# Altium PCB Mad17(grr).PcbDoc (part 3 of 3)
Units mil, origin at the board's own origin, x right, y up, seen from the top; angles counter-clockwise.
Board outline 5600 x 3900 mil, 2 copper layers (Top Layer, Bottom Layer); 72 components, 51 nets, 251 pads, 49 vias.
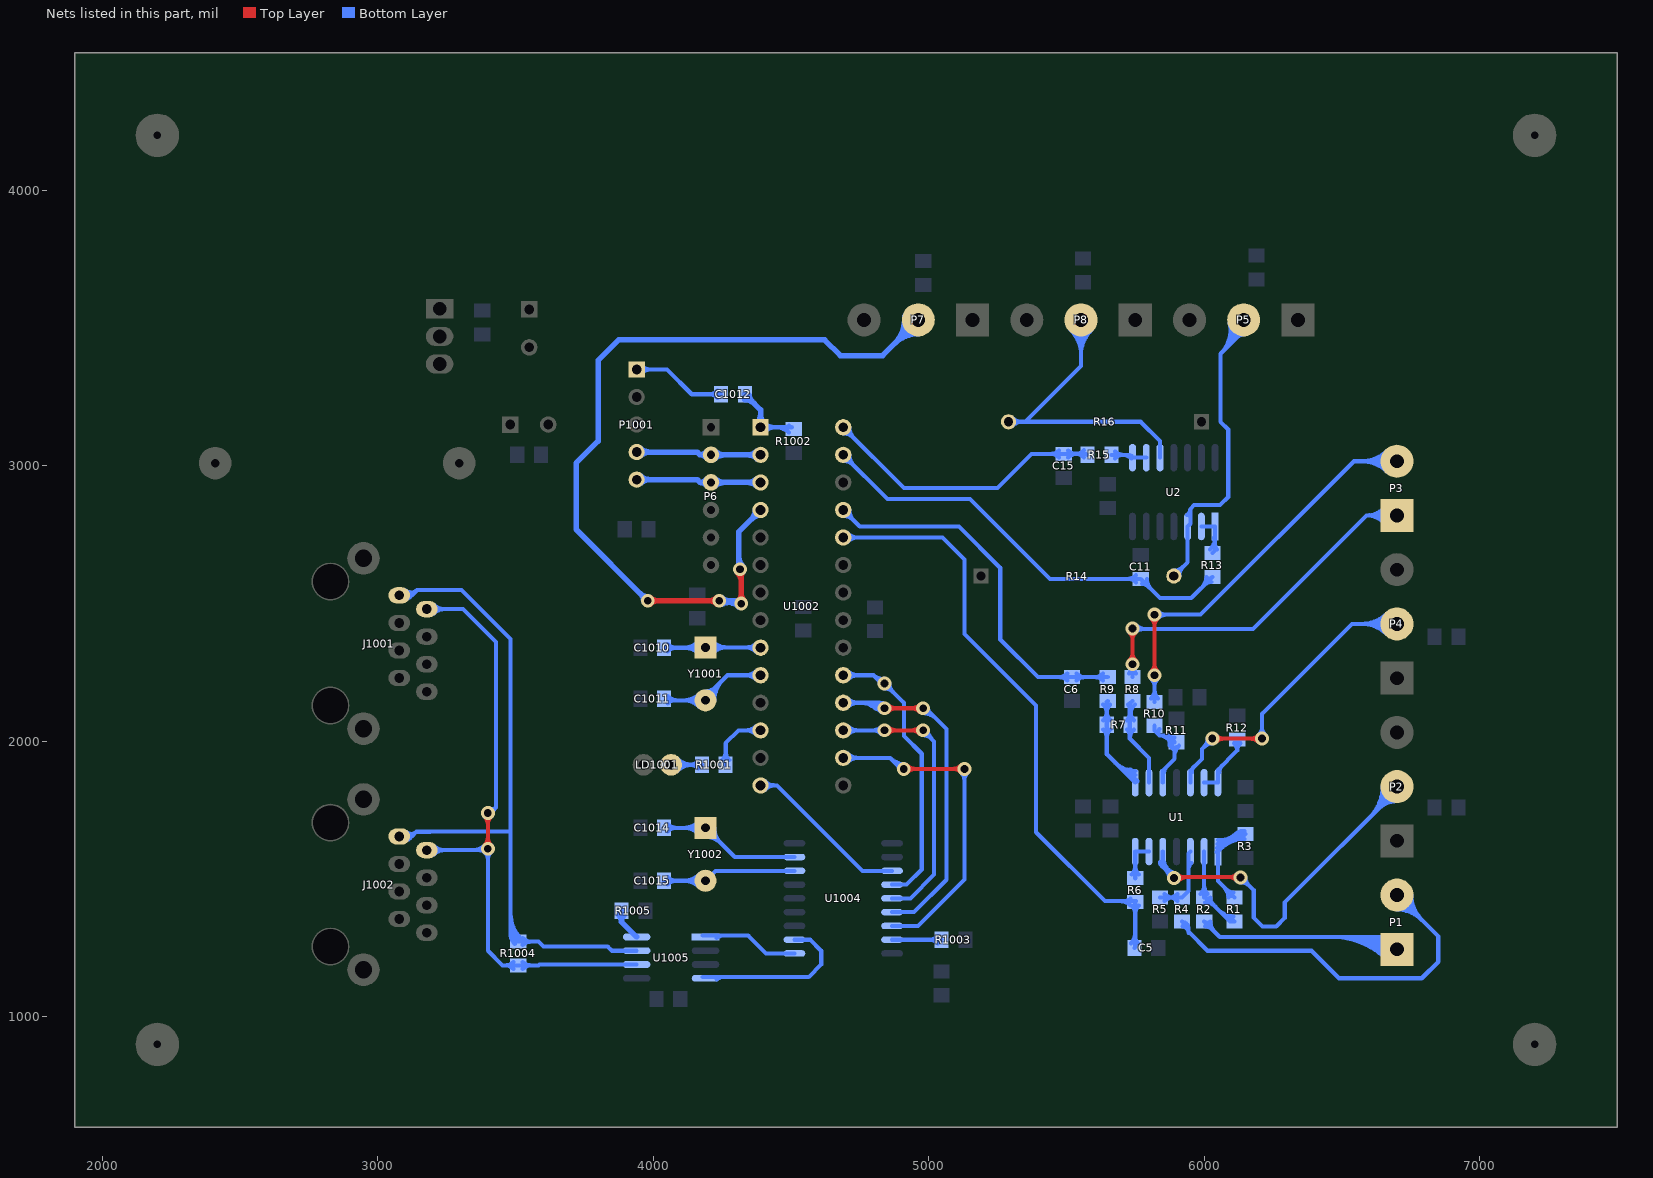
[diagram p3: the nets of this part, all layers, seen from the top]

## Via types
v1: diameter 50, hole 28, Top Layer to Bottom Layer, 49 vias

## Nets (pads, with @x,y where several pads share a name; then routed paths per layer and width w, separated by ;. In a path a pad name is that pad's centre, name@x,y a point inside that pad or via, vN(x,y) a via of type N, cw(c..) or ccw(c..) an arc to the next point about the centre after c; other vN are vias at no path point) (continued)
CAN_H: J1001.1 J1002.1 R1004.2 U1005.7 | length 3450.4
  Bottom Layer w15: J1002.1@3078.43,1655 3123.79,1655 ; J1001.1@3083.37,2523.71 ccw(c3100.29,2545.45) 3119.76,2525.97 ; J1001.1@3092.58,2535.55 ccw(c3110.8,2558.96) 3131.78,2537.99 ; J1001.1@3098.43,2550 J1001.1@3078.43,2530 3123.79,2530 ; J1001.1@3101.79,2547.39 ccw(c3121.31,2572.48) 3143.79,2550 ; 3189.53,1672.03 3140.82,1672.03 ; 3189.53,1672.5 3480,1672.5 ; 3482.5,1301.44 ccw(c3534.2,1301.44) R1004.2@3497.64,1264.89 ; 3482.5,1337.65 ccw(c3570.41,1337.65) R1004.2@3508.25,1275.49 ; 3482.5,1373.87 ccw(c3606.62,1373.87) R1004.2@3518.85,1286.1 ; U1005.7@3940,1240 3850,1240 3835,1255 3601.79,1255 3583.48,1273.31 R1004.2@3510,1273.31 3482.5,1300.81 ; 3123.79,1655 cw(c3123.79,1672.63) 3108,1664.79 ccw(c3123.79,1672.63) 3123.79,1655 ; 3123.79,1655 ccw(c3123.79,1637.37) 3108,1645.21 cw(c3123.79,1637.37) 3123.79,1655 ; 3123.79,1655 3140.82,1672.03 ; 3123.79,2530 cw(c3123.79,2547.63) 3108,2539.79 ccw(c3123.79,2547.63) 3123.79,2530 ; 3123.79,2530 ccw(c3123.79,2512.37) 3108,2520.21 cw(c3123.79,2512.37) 3123.79,2530 ; 3123.79,2530 3143.79,2550 ; 3140.82,1672.03 cw(c3121.57,1691.27) 3103.17,1671.22 ccw(c3121.57,1691.27) 3140.82,1672.03 ; 3143.79,2550 3303.64,2550 3482.5,2371.14 3482.5,1300.81 ; 3482.5,1300.81 cw(c3465.83,1284.14) 3488.59,1278.01 ccw(c3465.83,1284.14) 3482.5,1300.81 ; 3482.5,1300.81 ccw(c3505.23,1323.54) 3505.76,1291.4 cw(c3505.23,1323.54) 3482.5,1300.81 ; 3557.61,1273.31 cw(c3557.61,1316.98) 3526.73,1286.1 ccw(c3557.61,1316.98) 3557.61,1273.31 ; 3557.61,1273.31 ccw(c3557.61,1229.63) 3526.73,1260.52 cw(c3557.61,1229.63) 3557.61,1273.31 ; J1002.1@3082.88,1649.13 ccw(c3100.38,1668.19) 3118.68,1649.89 cw(c3100.38,1668.19) J1002.1@3082.88,1649.13 ; J1002.1@3093.02,1660.18 ccw(c3110.98,1679.73) 3129.75,1660.96 cw(c3110.98,1679.73) J1002.1@3093.02,1660.18
CAN_L: J1001.2 J1002.2 R1004.1 U1005.6 | length 3188.9
  Top Layer w15: v1(3400,1610) v1(3400,1740) ; 3400,1652.25 cw(c3357.75,1652.25) 3387.63,1622.37 ccw(c3357.75,1652.25) 3400,1652.25 ; 3400,1652.25 ccw(c3442.25,1652.25) 3412.37,1622.37 cw(c3442.25,1652.25) 3400,1652.25 ; 3400,1697.75 cw(c3442.25,1697.75) 3412.37,1727.63 ccw(c3442.25,1697.75) 3400,1697.75 ; 3400,1697.75 ccw(c3357.75,1697.75) 3387.63,1727.63 cw(c3357.75,1697.75) 3400,1697.75
  Bottom Layer w15: J1002.2@3178.43,1605 v1@3395,1605 ; J1001.2@3178.43,2480 3310,2480 3430,2360 3430,1760 ; J1002.2@3203.84,1589.42 cw(c3241.45,1551.82) 3241.45,1605 cw(c3241.45,1658.18) J1002.2@3203.84,1620.58 ; J1001.2@3203.84,2464.42 cw(c3241.45,2426.82) 3241.45,2480 cw(c3241.45,2533.18) J1001.2@3203.84,2495.58 ; v1@3389.08,1596.32 cw(c3370.98,1573.64) 3400,1573.64 ; v1(3400,1610) 3400,1573.64 ; v1(3400,1740) 3410,1740 3430,1760 ; v1@3410.92,1596.32 ccw(c3429.02,1573.64) 3400,1573.64 ; U1005.6@3940,1190 3586.79,1190 3583.48,1186.69 R1004.1@3510,1186.69 3453.31,1186.69 3400,1240 3400,1573.64 ; 3430,1760 cw(c3415.7,1774.3) 3407.28,1755.91 ccw(c3415.7,1774.3) 3430,1760 ; 3462.39,1186.69 cw(c3462.39,1143.02) 3493.27,1173.9 ccw(c3462.39,1143.02) 3462.39,1186.69 ; 3462.39,1186.69 ccw(c3462.39,1230.37) 3493.27,1199.48 cw(c3462.39,1230.37) 3462.39,1186.69 ; 3557.61,1186.69 cw(c3557.61,1230.37) 3526.73,1199.48 ccw(c3557.61,1230.37) 3557.61,1186.69 ; 3557.61,1186.69 ccw(c3557.61,1143.02) 3526.73,1173.9 cw(c3557.61,1143.02) 3557.61,1186.69 ; 3345.68,1605 ccw(c3345.68,1664.32) 3387.63,1622.37 cw(c3345.68,1664.32) 3345.68,1605 ; 3369.82,1605 cw(c3369.82,1579.82) 3387.63,1597.63 ccw(c3369.82,1579.82) 3369.82,1605 ; v1@3417.5,1740 cw(c3435.61,1740) 3422.8,1752.8 ccw(c3435.61,1740) v1@3417.5,1740
INCURRENT: C11.2 R13.2 U1002.27 | length 2137.5
  Bottom Layer w15: U1002.27@4690,3040 4850,2880 5150,2880 5440,2590 C11.2@5770,2590 5840,2520 5953.31,2520 R13.2@6030,2596.69 ; C11.2@5773.94,2571.91 cw(c5773.94,2537.74) 5798.1,2561.9 ; C11.2@5792.03,2590 ccw(c5845.21,2590) 5807.6,2552.4 ; 5999.83,2566.32 cw(c6037.43,2556.25) R13.2@6026.9,2593.72 ; 4727.6,3002.4 cw(c4765.21,3040) 4712.03,3040 ccw(c4765.21,3040) 4727.6,3002.4 ; 4727.6,3002.4 ccw(c4690,2964.79) 4690,3017.97 cw(c4690,2964.79) 4727.6,3002.4 ; 5722.39,2590 cw(c5722.39,2546.33) 5753.27,2577.21 ccw(c5722.39,2546.33) 5722.39,2590 ; 5722.39,2590 ccw(c5722.39,2633.67) 5753.27,2602.79 cw(c5722.39,2633.67) 5722.39,2590 ; 5992.4,2559.09 ccw(c5954.79,2596.69) 6007.97,2596.69 cw(c5954.79,2596.69) 5992.4,2559.09 ; 6001.9,2568.59 cw(c6026.06,2544.43) 6026.06,2578.6 ccw(c6026.06,2544.43) 6001.9,2568.59
LED: R1001.2 U1002.12 | length 445.1
  Bottom Layer w15: R1001.2@4263.31,1915 4263.31,1993.31 4310,2040 U1002.12@4390,2040 ; U1002.12@4374.42,2024.42 ccw(c4336.82,1986.82) 4336.82,2040 ccw(c4336.82,2093.18) U1002.12@4374.42,2055.58 ; 4263.31,1962.61 cw(c4219.63,1962.61) 4250.52,1931.73 ccw(c4219.63,1962.61) 4263.31,1962.61 ; 4263.31,1962.61 ccw(c4306.98,1962.61) 4276.1,1931.73 cw(c4306.98,1962.61) 4263.31,1962.61
MCP2515_INT: U1002.14 U1004.12 | length 689.1
  Bottom Layer w15: U1002.14@4390,1840 4450,1840 4760,1530 U1004.12@4867.17,1530 ; U1002.14@4405.58,1824.42 cw(c4443.18,1786.82) 4443.18,1840 cw(c4443.18,1893.18) U1002.14@4405.58,1855.58
MCP2515_MISO: U1002.18 U1004.15 | length 2300
  Top Layer w15: v1(4840,2120) v1(4980,2120) ; 4882.25,2120 cw(c4882.25,2162.25) 4852.37,2132.37 ccw(c4882.25,2162.25) 4882.25,2120 ; 4882.25,2120 ccw(c4882.25,2077.75) 4852.37,2107.63 cw(c4882.25,2077.75) 4882.25,2120 ; 4937.75,2120 cw(c4937.75,2077.75) 4967.63,2107.63 ccw(c4937.75,2077.75) 4937.75,2120 ; 4937.75,2120 ccw(c4937.75,2162.25) 4967.63,2132.37 cw(c4937.75,2162.25) 4937.75,2120
  Bottom Layer w15: U1002.18@4690,2140 4820,2140 v1(4840,2120) ; 4786.53,2131.35 ccw(c4806.02,2165.11) v1@4829.47,2133.98 ; 4806.12,2136.77 ccw(c4820.22,2161.18) v1@4832.42,2135.77 ; 4806.16,2120.02 ccw(c4820.83,2145.44) v1@4838.5,2122 ; 4807.25,2136.12 cw(c4790.25,2106.67) v1@4823.1,2115.47 ; U1004.15@4867.17,1380 4947.28,1380 5065,1497.72 5065,2045 4990,2120 v1(4980,2120) ; v1@4982.33,2120.91 ccw(c5024.49,2137.47) 5012.76,2093.72 ; 4743.18,2140 cw(c4743.18,2193.18) 4705.58,2155.58 ccw(c4743.18,2193.18) 4743.18,2140 ; 4743.18,2140 ccw(c4743.18,2086.82) 4705.58,2124.42 cw(c4743.18,2086.82) 4743.18,2140 ; 4749.47,2140 cw(c4749.47,2029.47) 4827.63,2107.63 ccw(c4749.47,2029.47) 4749.47,2140 ; 4785.68,2140 cw(c4785.68,2065.68) 4838.23,2118.23 ccw(c4785.68,2065.68) 4785.68,2140 ; 4821.89,2140 cw(c4821.89,2101.89) 4848.84,2128.84 ccw(c4821.89,2101.89) 4821.89,2140 ; v1@4980,2102.5 cw(c4980,2036.11) 5026.95,2083.05 ccw(c4980,2036.11) v1@4980,2102.5 ; v1@4997.5,2120 ccw(c5015.61,2120) 5002.8,2107.2 cw(c5015.61,2120) v1@4997.5,2120
MCP2515_MOSI: U1002.17 U1004.14 | length 1726.8
  Top Layer w15: v1(4840,2040) v1@4990,2040 ; 4882.25,2040 cw(c4882.25,2082.25) 4852.37,2052.37 ccw(c4882.25,2082.25) 4882.25,2040 ; 4882.25,2040 ccw(c4882.25,1997.75) 4852.37,2027.63 cw(c4882.25,1997.75) 4882.25,2040 ; 4937.75,2040 cw(c4937.75,1997.75) 4967.63,2027.63 ccw(c4937.75,1997.75) 4937.75,2040 ; 4937.75,2040 ccw(c4937.75,2082.25) 4967.63,2052.37 cw(c4937.75,2082.25) 4937.75,2040
  Bottom Layer w15: U1002.17@4690,2040 v1(4840,2040) ; U1004.14@4867.17,1430 4933.64,1430 5020,1516.36 5020,2000 v1(4980,2040) ; 4743.18,2040 cw(c4743.18,2093.18) 4705.58,2055.58 ccw(c4743.18,2093.18) 4743.18,2040 ; 4743.18,2040 ccw(c4743.18,1986.82) 4705.58,2024.42 cw(c4743.18,1986.82) 4743.18,2040 ; 4797.75,2040 cw(c4797.75,1997.75) 4827.63,2027.63 ccw(c4797.75,1997.75) 4797.75,2040 ; 4797.75,2040 ccw(c4797.75,2082.25) 4827.63,2052.37 cw(c4797.75,2082.25) 4797.75,2040 ; 5009.87,2010.13 cw(c5039.75,2040) 4997.5,2040 ccw(c5039.75,2040) 5009.87,2010.13 ; 5009.87,2010.13 ccw(c4980,1980.25) 4980,2022.5 cw(c4980,1980.25) 5009.87,2010.13
MCP2515_SCK: U1002.19 U1004.13 | length 1434.5
  Bottom Layer w15: U1002.19@4690,2240 4800,2240 ; U1004.13@4867.17,1480 4920,1480 4975,1535 4975,1955 4910,2020 4910,2140 v1(4840,2210) 4830,2220 4820,2220 4800,2240 ; 4743.18,2240 cw(c4743.18,2293.18) 4705.58,2255.58 ccw(c4743.18,2293.18) 4743.18,2240 ; 4743.18,2240 ccw(c4743.18,2186.82) 4705.58,2224.42 cw(c4743.18,2186.82) 4743.18,2240 ; 4800,2240 ccw(c4831.56,2271.56) 4837.62,2227.34 cw(c4831.56,2271.56) 4800,2240 ; 4869.87,2180.13 cw(c4899.75,2210) 4857.5,2210 ccw(c4899.75,2210) 4869.87,2180.13 ; 4869.87,2180.13 ccw(c4840,2150.25) 4840,2192.5 cw(c4840,2150.25) 4869.87,2180.13 ; 4817.2,2222.8 cw(c4804.39,2210) 4822.5,2210 ccw(c4804.39,2210) 4817.2,2222.8
MCP2515_SS: U1002.16 U1004.16 | length 1847.1
  Top Layer w15: v1(4910,1900) v1(5130,1900) ; 4952.25,1900 cw(c4952.25,1942.25) 4922.37,1912.37 ccw(c4952.25,1942.25) 4952.25,1900 ; 4952.25,1900 ccw(c4952.25,1857.75) 4922.37,1887.63 cw(c4952.25,1857.75) 4952.25,1900 ; 5087.75,1900 cw(c5087.75,1857.75) 5117.63,1887.63 ccw(c5087.75,1857.75) 5087.75,1900 ; 5087.75,1900 ccw(c5087.75,1942.25) 5117.63,1912.37 cw(c5087.75,1942.25) 5087.75,1900
  Bottom Layer w15: U1002.16@4690,1940 4860,1940 4900,1900 v1(4910,1900) ; U1002.16@4705.58,1924.42 cw(c4743.18,1886.82) 4743.18,1940 cw(c4743.18,1993.18) U1002.16@4705.58,1955.58 ; U1004.16@4867.17,1330 4960.92,1330 5130,1499.08 v1(5130,1900) ; 4877.24,1926.28 cw(c4865.51,1882.53) v1@4907.67,1899.09 ; 5130,1857.75 cw(c5172.25,1857.75) 5142.37,1887.63 ccw(c5172.25,1857.75) 5130,1857.75 ; 5130,1857.75 ccw(c5087.75,1857.75) 5117.63,1887.63 cw(c5087.75,1857.75) 5130,1857.75 ; 4863.05,1936.95 ccw(c4910,1983.89) 4910,1917.5 cw(c4910,1983.89) 4863.05,1936.95 ; 4887.2,1912.8 cw(c4874.39,1900) 4892.5,1900 ccw(c4874.39,1900) 4887.2,1912.8
MOTORRPM: P7.2 U1002.4 | length 4333.7
  Top Layer w20: v1(3980,2510) v1(4240,2510) ; v1(4315.47,2625) 4320,2620.47 v1(4320,2500) ; 4016.21,2510 cw(c4016.21,2546.21) 3990.61,2520.61 ccw(c4016.21,2546.21) 4016.21,2510 ; 4016.21,2510 ccw(c4016.21,2473.79) 3990.61,2499.39 cw(c4016.21,2473.79) 4016.21,2510 ; 4203.79,2510 cw(c4203.79,2473.79) 4229.39,2499.39 ccw(c4203.79,2473.79) 4203.79,2510 ; 4203.79,2510 ccw(c4203.79,2546.21) 4229.39,2520.61 cw(c4203.79,2546.21) 4203.79,2510 ; 4320,2536.21 cw(c4283.79,2536.21) 4309.39,2510.61 ccw(c4283.79,2536.21) 4320,2536.21 ; 4320,2536.21 ccw(c4356.21,2536.21) 4330.61,2510.61 cw(c4356.21,2536.21) 4320,2536.21 ; v1@4304.87,2614.39 cw(c4268.33,2577.86) 4320,2577.86 ccw(c4268.33,2577.86) v1@4304.87,2614.39 ; 4320,2599.72 cw(c4340.76,2599.72) 4326.08,2614.39 ccw(c4340.76,2599.72) 4320,2599.72
  Bottom Layer w20: v1@3965,2510 ccw(c3928.79,2510) 3954.39,2535.61 ccw(c3980,2561.21) v1@3980,2525 ; v1(3980,2510) 3720,2770 3720,3010 3800,3090 3800,3383.03 3874.47,3457.5 4622.5,3457.5 4680,3400 4832.6,3400 P7.2@4962.6,3530 ; v1(4240,2510) v1@4310,2510 ; 4285.1,2503.42 ccw(c4293.62,2518.17) v1@4307.65,2508.51 ; v1@4310,2640 4310,2760 U1002.4@4390,2840 ; U1002.4@4370.47,2840 cw(c4323.33,2840) 4356.66,2806.66 cw(c4390,2773.33) U1002.4@4390,2820.47 ; P7.2@4912.6,3530 cw(c4791.89,3530) 4877.24,3444.64 cw(c4962.6,3359.29) P7.2@4962.6,3480 ; P7.2@4913.15,3530 P7.2@4913.15,3543.54 ; P7.2@4932.6,3530 cw(c4860.17,3530) 4911.39,3478.79 cw(c4962.6,3427.57) P7.2@4962.6,3500 ; v1@4247.87,2497.23 cw(c4273.61,2455.46) 4286.31,2502.85 ; v1@4247.87,2497.23 cw(c4273.61,2455.46) 4286.31,2502.85 ; v1@4247.87,2497.23 cw(c4273.61,2455.46) 4286.31,2502.85 ; 4276.21,2510 cw(c4276.21,2546.21) 4250.61,2520.61 ccw(c4276.21,2546.21) 4276.21,2510 ; 4276.21,2510 ccw(c4276.21,2473.79) 4250.61,2499.39 cw(c4276.21,2473.79) 4276.21,2510 ; v1@4259.64,2510 cw(c4259.64,2439.64) 4309.39,2489.39 ccw(c4259.64,2439.64) v1@4259.64,2510 ; 4310,2674.42 ccw(c4364.9,2674.42) 4326.08,2635.61 cw(c4364.9,2674.42) 4310,2674.42
MOTORTEMPERATURE: C5.2 R6.2 U1002.24 | length 2647.2
  Bottom Layer w15: U1002.24@4690,2740 5050,2740 5130,2660 5130,2390 5390,2130 5390,1670 5640,1420 R6.2@5753.31,1420 ; 5694.4,1420 cw(c5694.4,1365.03) R6.2@5733.27,1403.9 ; 5710.37,1420 ccw(c5710.37,1452.38) R6.2@5733.27,1429.48 ; C5.2@5733.9,1266.73 ccw(c5695.03,1305.6) 5750,1305.6 ; C5.2@5746.69,1250 5750,1253.31 R6.2@5750,1416.69 ; 5750,1289.63 ccw(c5782.38,1289.63) C5.2@5759.48,1266.73 ; 4743.18,2740 cw(c4743.18,2793.18) 4705.58,2755.58 ccw(c4743.18,2793.18) 4743.18,2740 ; 4743.18,2740 ccw(c4743.18,2686.82) 4705.58,2724.42 cw(c4743.18,2686.82) 4743.18,2740 ; 5750,1373.02 cw(c5793.67,1373.02) 5762.79,1403.9 ccw(c5793.67,1373.02) 5750,1373.02 ; 5750,1373.02 ccw(c5706.33,1373.02) 5737.21,1403.9 cw(c5706.33,1373.02) 5750,1373.02
MOTORVOLTAGE: C6.2 R9.2 U1002.25 | length 1942.3
  Bottom Layer w15: U1002.25@4690,2840 4750,2780 5110,2780 5260,2630 5260,2370 5396.69,2233.31 C6.2@5520,2233.31 R9.2@5650,2233.31 ; 4727.6,2802.4 cw(c4765.21,2840) 4712.03,2840 ccw(c4765.21,2840) 4727.6,2802.4 ; 4727.6,2802.4 ccw(c4690,2764.79) 4690,2817.97 cw(c4690,2764.79) 4727.6,2802.4 ; 5472.39,2233.31 cw(c5472.39,2189.63) 5503.27,2220.52 ccw(c5472.39,2189.63) 5472.39,2233.31 ; 5472.39,2233.31 ccw(c5472.39,2276.98) 5503.27,2246.1 cw(c5472.39,2276.98) 5472.39,2233.31 ; 5567.61,2233.31 cw(c5567.61,2276.98) 5536.73,2246.1 ccw(c5567.61,2276.98) 5567.61,2233.31 ; 5567.61,2233.31 ccw(c5567.61,2189.63) 5536.73,2220.52 cw(c5567.61,2189.63) 5567.61,2233.31 ; 5602.39,2233.31 cw(c5602.39,2189.63) 5633.27,2220.52 ccw(c5602.39,2189.63) 5602.39,2233.31 ; 5602.39,2233.31 ccw(c5602.39,2276.98) 5633.27,2246.1 cw(c5602.39,2276.98) 5602.39,2233.31
NetC1012_1: C1012.1 R1002.2 U1002.1 | length 768.3
  Bottom Layer w15: U1002.1@4390,3140 R1002.2@4503.31,3140 ; 4443.18,3140 cw(c4443.18,3193.18) 4405.58,3155.58 ccw(c4443.18,3193.18) 4443.18,3140 ; 4443.18,3140 ccw(c4443.18,3086.82) 4405.58,3124.42 cw(c4443.18,3086.82) 4443.18,3140 ; 4446.23,3140 cw(c4446.23,3073.47) 4493.27,3120.52 ccw(c4446.23,3073.47) 4446.23,3140 ; 4478.55,3140 ccw(c4478.55,3160.82) 4493.27,3146.1 cw(c4478.55,3160.82) 4478.55,3140
  Bottom Layer w20: C1012.1@4333.31,3240.47 cw(c4333.31,3193.33) 4366.64,3226.66 ; C1012.1@4333.31,3260 4390,3203.31 U1002.1@4390,3140 ; C1012.1@4348.9,3256.06 ccw(c4377.03,3256.06) C1012.1@4357.14,3236.17 ; 4390,3187.14 cw(c4342.86,3187.14) 4376.19,3153.81 ccw(c4342.86,3187.14) 4390,3187.14 ; 4390,3187.14 ccw(c4437.14,3187.14) 4403.81,3153.81 cw(c4437.14,3187.14) 4390,3187.14
NetC1014_2: C1014.2 U1004.8 Y1002.1 | length 1033.2
  Bottom Layer w15: C1014.2@4040,1686.06 Y1002.1@4190,1686.06 4296.06,1580 U1004.8@4512.83,1580 ; Y1002.1@4167.02,1663.08 ccw(c4111.54,1607.6) 4111.54,1686.06 ccw(c4111.54,1764.52) Y1002.1@4167.02,1709.04 ; Y1002.1@4177.63,1673.69 ccw(c4147.75,1643.81) 4147.75,1686.06 ccw(c4147.75,1728.31) Y1002.1@4177.63,1698.44 ; Y1002.1@4190,1653.56 cw(c4190,1575.1) 4245.48,1630.58 cw(c4300.96,1686.06) Y1002.1@4222.5,1686.06 ; Y1002.1@4190,1668.56 cw(c4190,1626.31) 4219.87,1656.19 cw(c4249.75,1686.06) Y1002.1@4207.5,1686.06 ; 4083.67,1686.06 cw(c4083.67,1729.74) 4052.79,1698.85 ccw(c4083.67,1729.74) 4083.67,1686.06 ; 4083.67,1686.06 ccw(c4083.67,1642.39) 4052.79,1673.27 cw(c4083.67,1642.39) 4083.67,1686.06
NetC1015_2: C1015.2 U1004.7 Y1002.2 | length 814.6
  Bottom Layer w15: C1015.2@4040,1493.94 Y1002.2@4190,1493.94 4226.06,1530 U1004.7@4512.83,1530 ; Y1002.2@4167.02,1470.96 ccw(c4111.54,1415.48) 4111.54,1493.94 ccw(c4111.54,1572.4) Y1002.2@4167.02,1516.92 ; Y1002.2@4177.63,1481.56 ccw(c4147.75,1451.69) 4147.75,1493.94 ccw(c4147.75,1536.19) Y1002.2@4177.63,1506.31 ; 4083.67,1493.94 cw(c4083.67,1537.61) 4052.79,1506.73 ccw(c4083.67,1537.61) 4083.67,1493.94 ; 4083.67,1493.94 ccw(c4083.67,1450.26) 4052.79,1481.15 cw(c4083.67,1450.26) 4083.67,1493.94
NetLD1001_1: LD1001.1 R1001.1 | length 433.7
  Bottom Layer w15: LD1001.1@4065,1915 R1001.1@4176.69,1915 ; LD1001.1@4076.93,1903.07 cw(c4105.73,1874.27) 4105.73,1915 cw(c4105.73,1955.73) LD1001.1@4076.93,1926.93 ; LD1001.1@4087.54,1892.46 cw(c4141.94,1838.06) 4141.94,1915 cw(c4141.94,1991.94) LD1001.1@4087.54,1937.54 ; 4133.02,1915 cw(c4133.02,1871.33) 4163.9,1902.21 ccw(c4133.02,1871.33) 4133.02,1915 ; 4133.02,1915 ccw(c4133.02,1958.67) 4163.9,1927.79 cw(c4133.02,1958.67) 4133.02,1915
NetP1_1: P1.1 R2.1 | length 3040.2
  Bottom Layer w15: R2.1@6000,1346.69 6056.69,1290 6655.2,1290 P1.1@6700,1245.2 ; R2.1@6003.1,1343.72 cw(c5992.57,1306.25) 6030.17,1316.32 ; 6607.95,1275 ccw(c6630.82,1313.09) P1.1@6662.53,1281.97 ; 6624.26,1265.21 ccw(c6644.78,1299.39) P1.1@6673.24,1271.46 ; 6625.28,1264.59 cw(c6598.4,1219.83) P1.1@6649.06,1232.48 ; P1.1@6640.4,1271.24 ccw(c6656.18,1298.58) P1.1@6676.21,1274.18 ; P1.1@6640.57,1255.42 ccw(c6658.74,1285.69) P1.1@6683.94,1260.96 ; P1.1@6647.67,1240.93 ccw(c6595.42,1236.67) 6621.63,1282.08 ccw(c6641.49,1316.47) P1.1@6666.69,1285.78 ; R2.1@6003.94,1328.6 cw(c6003.94,1294.43) 6028.1,1318.59 ccw(c6003.94,1294.43) R2.1@6003.94,1328.6 ; R2.1@6022.03,1346.69 ccw(c6075.21,1346.69) 6037.6,1309.09 cw(c6075.21,1346.69) R2.1@6022.03,1346.69 ; 6465.09,1290 cw(c6465.09,1010.29) 6662.88,1208.07 ccw(c6465.09,1010.29) 6465.09,1290 ; 6501.3,1290 cw(c6501.3,1046.5) 6673.48,1218.68 ccw(c6501.3,1046.5) 6501.3,1290 ; 6537.52,1290 cw(c6537.52,1082.71) 6684.09,1229.29 ccw(c6537.52,1082.71) 6537.52,1290 ; 6573.73,1290 cw(c6573.73,1118.93) 6694.7,1239.89 ccw(c6573.73,1118.93) 6573.73,1290 ; 6609.94,1290 cw(c6609.94,1155.14) 6705.3,1250.5 ccw(c6609.94,1155.14) 6609.94,1290 ; P1.1@6646.16,1290 cw(c6646.16,1191.35) 6715.91,1261.11 ccw(c6646.16,1191.35) P1.1@6646.16,1290
NetP1_2: P1.2 R4.1 | length 1760.7
  Bottom Layer w15: R4.1@5920,1346.69 5942.97,1323.72 5942.97,1309.71 6012.68,1240 6390,1240 6490,1140 6790,1140 6850,1200 6850,1292.05 P1.2@6700,1442.05 ; R4.1@5921.89,1328.72 cw(c5919.2,1305.1) 5942.97,1305.1 ; R4.1@5923.59,1343.62 cw(c5921.12,1321.91) R4.1@5942.97,1321.91 ; P1.2@6700,1389.55 cw(c6700,1262.8) 6789.62,1352.42 cw(c6879.25,1442.05) P1.2@6752.5,1442.05 ; P1.2@6700,1404.55 cw(c6700,1314.01) 6764.02,1378.03 cw(c6828.03,1442.05) P1.2@6737.5,1442.05
NetP2_2: P2.2 U1.5 | length 2594.7
  Top Layer w15: v1@5890.47,1507.8 6130.49,1507.8 v1(6132.2,1506.1) ; v1@5902.85,1491.52 cw(c5942.15,1452.22) 5942.15,1507.8 ccw(c5942.15,1452.22) v1@5902.85,1491.52 ; v1@5902.85,1516.27 ccw(c5923.29,1536.71) 5923.29,1507.8 cw(c5923.29,1536.71) v1@5902.85,1516.27 ; 6085.84,1507.8 cw(c6085.84,1459.74) 6119.82,1493.73 ccw(c6085.84,1459.74) 6085.84,1507.8 ; 6094.06,1507.8 ccw(c6094.06,1544.24) 6119.82,1518.48 cw(c6094.06,1544.24) 6094.06,1507.8
  Bottom Layer w15: U1.5@5847.5,1558.17 cw(c5833.22,1533.44) 5860.81,1540.83 ; U1.5@5850,1600 5850,1544.37 v1(5890.47,1503.9) ; 5862.83,1543.6 cw(c5881.73,1562.5) U1.5@5855,1562.5 ; v1(6132.2,1506.1) 6133.9,1506.1 6180,1460 6180,1360 6212.5,1327.5 6261.75,1327.5 6292.5,1358.25 6292.5,1415 P2.2@6700,1822.5 ; 6601.01,1723.51 ccw(c6488.77,1835.75) P2.2@6647.5,1835.75 ; 6626.62,1749.12 ccw(c6539.98,1835.75) P2.2@6662.5,1835.75 ; 6632.99,1755.49 cw(c6700,1688.49) P2.2@6700,1783.25 ; 6652.22,1774.72 ccw(c6591.2,1835.75) P2.2@6677.5,1835.75 ; 6658.6,1781.1 cw(c6700,1739.7) P2.2@6700,1798.25 ; U1.5@5854.88,1551.54 ccw(c5911.98,1584.51) v1@5894.98,1520.81 ; U1.5@5854.88,1551.54 ccw(c5911.98,1584.51) v1@5894.98,1520.81 ; U1.5@5854.88,1551.54 ccw(c5911.98,1584.51) v1@5894.98,1520.81 ; U1.5@5855,1562.5 ccw(c5910.84,1562.5) 5871.36,1523.01 cw(c5910.84,1562.5) U1.5@5855,1562.5 ; 5860.6,1533.77 cw(c5830.72,1503.9) 5872.97,1503.9 ccw(c5830.72,1503.9) 5860.6,1533.77 ; 5860.6,1533.77 ccw(c5890.47,1563.65) 5890.47,1521.4 cw(c5890.47,1563.65) 5860.6,1533.77 ; 5871.73,1522.36 cw(c5855.84,1513.18) v1@5873.57,1508.43 ; 5871.73,1522.36 cw(c5855.84,1513.18) v1@5873.57,1508.43 ; 5871.73,1522.36 cw(c5855.84,1513.18) v1@5873.57,1508.43 ; U1.5@5840,1562.5 ccw(c5859.63,1562.5) 5845.75,1548.62 cw(c5859.63,1562.5) U1.5@5840,1562.5 ; v1@6132.2,1488.6 cw(c6132.2,1442.24) 6164.98,1475.02 ccw(c6132.2,1442.24) v1@6132.2,1488.6 ; v1@6149.7,1506.1 ccw(c6187.84,1506.1) 6160.87,1479.13 cw(c6187.84,1506.1) v1@6149.7,1506.1
NetP3_1: P3.1 R8.1 | length 2182
  Top Layer w15: v1(5740,2280) v1(5740,2410) ; 5740,2322.25 cw(c5697.75,2322.25) 5727.63,2292.37 ccw(c5697.75,2322.25) 5740,2322.25 ; 5740,2322.25 ccw(c5782.25,2322.25) 5752.37,2292.37 cw(c5782.25,2322.25) 5740,2322.25 ; 5740,2367.75 cw(c5782.25,2367.75) 5752.37,2397.63 ccw(c5782.25,2367.75) 5740,2367.75 ; 5740,2367.75 ccw(c5697.75,2367.75) 5727.63,2397.63 cw(c5697.75,2367.75) 5740,2367.75
  Bottom Layer w15: R8.1@5740,2233.31 v1(5740,2280) ; v1(5740,2410) 5742.5,2407.5 6177.5,2407.5 6590,2820 ; v1@5752.37,2397.63 cw(c5776.21,2373.79) 5776.21,2407.5 ; v1@5752.37,2422.37 ccw(c5788.28,2458.28) 5788.28,2407.5 ; P3.1@6659.18,2786.98 ccw(c6590.01,2731.02) 6590.01,2820 ; P3.1@6659.18,2853.02 cw(c6590.01,2908.98) 6590.01,2820 ; P3.1@6670.84,2796.42 ccw(c6621.43,2756.45) 6621.43,2820 ccw(c6621.43,2883.55) P3.1@6670.84,2843.58 ; P3.1@6700,2820 6590,2820 ; R8.1@5740,2237.75 cw(c5782.25,2237.75) 5752.37,2267.63 ccw(c5782.25,2237.75) R8.1@5740,2237.75 ; R8.1@5740,2237.75 ccw(c5697.75,2237.75) 5727.63,2267.63 cw(c5697.75,2237.75) R8.1@5740,2237.75 ; v1@5740,2276.98 cw(c5696.33,2276.98) 5727.21,2246.1 ccw(c5696.33,2276.98) v1@5740,2276.98 ; v1@5740,2276.98 ccw(c5783.67,2276.98) 5752.79,2246.1 cw(c5783.67,2276.98) v1@5740,2276.98
NetP3_2: P3.2 R10.1 | length 2436.8
  Top Layer w15: v1(5820,2240) v1(5820,2460) ; 5820,2282.25 cw(c5777.75,2282.25) 5807.63,2252.37 ccw(c5777.75,2282.25) 5820,2282.25 ; 5820,2282.25 ccw(c5862.25,2282.25) 5832.37,2252.37 cw(c5862.25,2282.25) 5820,2282.25 ; 5820,2417.75 cw(c5862.25,2417.75) 5832.37,2447.63 ccw(c5862.25,2417.75) 5820,2417.75 ; 5820,2417.75 ccw(c5777.75,2417.75) 5807.63,2447.63 cw(c5777.75,2417.75) 5820,2417.75
  Bottom Layer w15: R10.1@5820,2143.31 v1(5820,2240) ; v1(5820,2460) 5987.32,2460 6544.17,3016.85 P3.2@6700,3016.85 ; P3.2@6662.88,2979.73 ccw(c6573.25,2890.1) 6573.25,3016.85 ccw(c6573.25,3143.6) P3.2@6662.88,3053.97 ; P3.2@6673.48,2990.33 ccw(c6609.47,2926.32) 6609.47,3016.85 ccw(c6609.47,3107.38) P3.2@6673.48,3043.37 ; 5820,2186.98 cw(c5776.33,2186.98) 5807.21,2156.1 ccw(c5776.33,2186.98) 5820,2186.98 ; 5820,2186.98 ccw(c5863.67,2186.98) 5832.79,2156.1 cw(c5863.67,2186.98) 5820,2186.98 ; 5820,2197.75 cw(c5862.25,2197.75) 5832.37,2227.63 ccw(c5862.25,2197.75) 5820,2197.75 ; 5820,2197.75 ccw(c5777.75,2197.75) 5807.63,2227.63 cw(c5777.75,2197.75) 5820,2197.75 ; 5862.25,2460 cw(c5862.25,2502.25) 5832.37,2472.37 ccw(c5862.25,2502.25) 5862.25,2460 ; 5862.25,2460 ccw(c5862.25,2417.75) 5832.37,2447.63 cw(c5862.25,2417.75) 5862.25,2460
NetP4_2: P4.2 U1.12 | length 1939.9
  Top Layer w15: v1(6030,2010) v1(6210,2010) ; 6072.25,2010 cw(c6072.25,2052.25) 6042.37,2022.37 ccw(c6072.25,2052.25) 6072.25,2010 ; 6072.25,2010 ccw(c6072.25,1967.75) 6042.37,1997.63 cw(c6072.25,1967.75) 6072.25,2010 ; 6167.75,2010 cw(c6167.75,1967.75) 6197.63,1997.63 ccw(c6167.75,1967.75) 6167.75,2010 ; 6167.75,2010 ccw(c6167.75,2052.25) 6197.63,2022.37 cw(c6167.75,2052.25) 6167.75,2010
  Bottom Layer w15: U1.12@5950,1850 5950,1894.57 5992.03,1936.6 5992.03,1972.03 v1(6030,2010) ; v1@6197.63,2022.37 ccw(c6167.75,2052.25) 6210,2052.25 ccw(c6252.25,2052.25) v1@6222.37,2022.37 ; v1(6210,2010) 6210,2100 6536.3,2426.3 P4.2@6700,2426.3 ; P4.2@6662.88,2389.18 ccw(c6573.25,2299.55) 6573.25,2426.3 ccw(c6573.25,2553.05) P4.2@6662.88,2463.42 ; P4.2@6673.48,2399.78 ccw(c6609.47,2335.77) 6609.47,2426.3 ccw(c6609.47,2516.83) P4.2@6673.48,2452.82 ; 6000.13,1980.13 cw(c6030,1950.25) 6030,1992.5 ccw(c6030,1950.25) 6000.13,1980.13 ; 6000.13,1980.13 ccw(c5970.25,2010) 6012.5,2010 cw(c5970.25,2010) 6000.13,1980.13 ; U1.12@5955,1887.5 cw(c5984.14,1887.5) 5963.54,1908.11 ccw(c5984.14,1887.5) U1.12@5955,1887.5
NetP5_2: P5.2 R14.2 U2.3 | length 1649.5
  Bottom Layer w15: R14.2@5890,2600 5940,2650 U2.3@5940,2780 5950,2790 5950,2844.07 ; R14.2@5890,2620.06 ccw(c5890,2668.49) 5924.24,2634.24 ccw(c5958.49,2600) R14.2@5910.06,2600 ; U2.3@5944.57,2819.54 cw(c5954.36,2823.92) 5946.63,2831.36 ; 6079.3,3426.15 ccw(c6006.18,3499.28) P5.2@6107.1,3521.82 ; P5.2@6092.46,3518.55 cw(c5974.63,3492.23) 6060,3406.86 ; 6098.6,3445.45 ccw(c6037.72,3506.32) P5.2@6121.74,3525.09 ; 6117.89,3464.74 ccw(c6069.27,3513.37) P5.2@6136.38,3528.36 ; 6121.42,3468.27 cw(c6143.7,3445.99) P5.2@6143.7,3477.5 ; P5.2@6163.43,3510.28 6060,3406.85 ; 5950,2844.07 cw(c5923.97,2844.07) 5937.42,2821.78 ccw(c5923.97,2844.07) 5950,2844.07 ; 5950,2844.07 5963.43,2857.5 6057.5,2857.5 6087.5,2887.5 6087.5,3132.5 6060,3160 6060,3406.85
NetP8_2: P8.2 R16.2 U2.10 | length 1586.6
  Bottom Layer w15: R16.2@5290,3160 5350,3160 ; P8.2@5516.03,3492.88 cw(c5426.4,3403.25) 5553.15,3403.25 cw(c5679.9,3403.25) P8.2@5590.27,3492.88 ; P8.2@5526.63,3503.48 cw(c5462.62,3439.47) 5553.15,3439.47 cw(c5643.68,3439.47) P8.2@5579.67,3503.48 ; P8.2@5553.15,3530 5553.15,3363.15 5350,3160 ; U2.10@5840,3030 5840,3090 5770,3160 5350,3160 ; 5338.43,3160 cw(c5338.43,3208.43) 5304.18,3174.18 ccw(c5338.43,3208.43) 5338.43,3160 ; 5338.43,3160 ccw(c5338.43,3111.57) 5304.18,3145.82 cw(c5338.43,3111.57) 5338.43,3160
NetR1_1: R1.1 R2.2 U1.2 | length 844.3
  Bottom Layer w15: U1.2@6000,1600 R2.2@6000,1433.31 6007.39,1433.31 6094.01,1346.69 R1.1@6110,1346.69 ; R2.2@6006.92,1434.12 ccw(c6043.89,1444.18) 6033.97,1407.17 ; 6070.03,1374.44 cw(c6057.07,1326.09) R1.1@6103.21,1345.49 ; 6000,1476.98 cw(c5956.33,1476.98) 5987.21,1446.1 ccw(c5956.33,1476.98) 6000,1476.98 ; 6000,1476.98 ccw(c6043.67,1476.98) 6012.79,1446.1 cw(c6043.67,1476.98) 6000,1476.98 ; R2.2@6003.94,1415.22 cw(c6003.94,1363.19) 6040.72,1399.98 ccw(c6003.94,1363.19) R2.2@6003.94,1415.22 ; R2.2@6022.03,1433.31 ccw(c6057.35,1433.31) 6032.37,1408.33 cw(c6057.35,1433.31) R2.2@6022.03,1433.31 ; 6054.6,1386.1 ccw(c6106.06,1437.56) 6106.06,1364.78 cw(c6106.06,1437.56) 6054.6,1386.1 ; 6080.21,1360.49 ccw(c6106.06,1386.35) 6106.06,1349.78 cw(c6106.06,1386.35) 6080.21,1360.49
NetR1_2: R1.2 R3.1 U1.1 | length 930.9
  Bottom Layer w15: U1.1@6044.33,1597.9 ccw(c6045.23,1604.15) U1.1@6049.69,1599.69 ; U1.1@6046.46,1612.75 ccw(c6050.54,1641.25) 6070.89,1620.89 ; U1.1@6048.58,1627.6 ccw(c6055.85,1678.35) 6092.1,1642.1 ; U1.1@6050.71,1642.45 ccw(c6061.16,1715.45) 6113.3,1663.3 ; U1.1@6059.26,1609.26 cw(c6146.06,1522.46) R3.1@6146.06,1645.22 ; 6079.83,1463.68 ccw(c6117.43,1473.75) R1.2@6106.9,1436.28 ; 6084.87,1634.87 cw(c6146.06,1573.68) R3.1@6146.06,1660.22 ; R1.2@6110,1433.31 6050,1493.31 U1.1@6050,1600 6113.31,1663.31 ; 6110.48,1660.48 cw(c6146.06,1624.89) R3.1@6146.06,1675.22 ; R3.1@6150,1663.31 6113.31,1663.31 ; 6113.31,1663.31 cw(c6113.31,1642.7) 6130.75,1653.67 ccw(c6113.31,1642.7) 6113.31,1663.31 ; 6113.31,1663.31 ccw(c6113.31,1683.91) 6130.75,1672.94 cw(c6113.31,1683.91) 6113.31,1663.31 ; 6072.4,1470.91 cw(c6034.79,1433.31) 6087.97,1433.31 ccw(c6034.79,1433.31) 6072.4,1470.91 ; 6081.9,1461.41 ccw(c6106.06,1485.57) 6106.06,1451.4 cw(c6106.06,1485.57) 6081.9,1461.41
NetR4_2: R4.2 R5.2 U1.3 | length 605.7
  Bottom Layer w15: R5.2@5840,1433.31 R4.2@5920,1433.31 5942.97,1456.28 5942.97,1592.97 U1.3@5950,1600 ; 5945.6,1545.21 ccw(c5932.68,1552.67) U1.3@5945.65,1560.03 ; 5872.39,1433.31 cw(c5872.39,1389.63) 5903.27,1420.52 ccw(c5872.39,1389.63) 5872.39,1433.31 ; 5872.39,1433.31 ccw(c5872.39,1476.98) 5903.27,1446.1 cw(c5872.39,1476.98) 5872.39,1433.31 ; 5887.61,1433.31 cw(c5887.61,1476.98) 5856.73,1446.1 ccw(c5887.61,1476.98) 5887.61,1433.31 ; 5887.61,1433.31 ccw(c5887.61,1389.63) 5856.73,1420.52 cw(c5887.61,1389.63) 5887.61,1433.31 ; 5942.97,1533.46 cw(c5979.04,1533.46) 5953.54,1558.96 ccw(c5979.04,1533.46) 5942.97,1533.46
NetR6_1: R6.1 U1.6 U1.7 | length 283.9
  Bottom Layer w15: R6.1@5750,1503.31 U1.7@5750,1600 U1.6@5800,1600 ; 5750,1546.98 cw(c5706.33,1546.98) 5737.21,1516.1 ccw(c5706.33,1546.98) 5750,1546.98 ; 5750,1546.98 ccw(c5793.67,1546.98) 5762.79,1516.1 cw(c5793.67,1546.98) 5750,1546.98
NetR7_1: R7.1 R8.2 U1.9 | length 816.8
  Bottom Layer w15: R8.2@5740,2146.69 5730,2136.69 5730,2010 5800,1940 U1.9@5800,1850 ; 5734.36,2104.64 ccw(c5757.63,2098.4) R7.1@5743.74,2078.72 ; 5734.36,2104.64 ccw(c5757.63,2098.4) R7.1@5743.74,2078.72 ; 5734.36,2104.64 ccw(c5757.63,2098.4) R7.1@5743.74,2078.72 ; R7.1@5720.52,2043.27 cw(c5697.62,2020.37) 5730,2020.37 ccw(c5697.62,2020.37) R7.1@5720.52,2043.27 ; R7.1@5720.52,2076.73 ccw(c5697.62,2099.63) 5730,2099.63 cw(c5697.62,2099.63) R7.1@5720.52,2076.73 ; R8.2@5723.27,2133.9 cw(c5707.03,2117.66) 5730,2117.66 ccw(c5707.03,2117.66) R8.2@5723.27,2133.9 ; 5730,2009.88 cw(c5772.44,2009.88) 5745,2042.26 ccw(c5772.44,2009.88) 5730,2009.88 ; R7.1@5730,2088.38 cw(c5794.37,2088.38) 5748.85,2133.9 ccw(c5794.37,2088.38) R7.1@5730,2088.38 ; 5730,2115.6 ccw(c5784.97,2115.6) 5746.1,2076.73 cw(c5784.97,2115.6) 5730,2115.6
NetR7_2: R7.2 R9.1 U1.8 | length 1116.8
  Bottom Layer w15: R9.1@5650,2146.69 5646.69,2143.39 R7.2@5646.69,2060 5646.69,1953.31 U1.8@5750,1850 ; 5728.33,1898.31 cw(c5720.94,1870.72) U1.8@5745.67,1885 ; 5732.97,1882.06 ccw(c5735.57,1891.77) U1.8@5745.21,1888.92 ; U1.8@5748.46,1862.91 cw(c5744.15,1846.82) U1.8@5758.79,1854.78 ; 5646.69,2012.39 cw(c5690.37,2012.39) 5659.48,2043.27 ccw(c5690.37,2012.39) 5646.69,2012.39 ; 5646.69,2012.39 ccw(c5603.02,2012.39) 5633.9,2043.27 cw(c5603.02,2012.39) 5646.69,2012.39 ; 5646.69,2107.61 cw(c5603.02,2107.61) 5633.9,2076.73 ccw(c5603.02,2107.61) 5646.69,2107.61 ; 5646.69,2107.61 ccw(c5690.37,2107.61) 5659.48,2076.73 cw(c5690.37,2107.61) 5646.69,2107.61 ; R9.1@5633.27,2133.9 cw(c5600.87,2101.5) 5646.69,2101.5 ccw(c5600.87,2101.5) R9.1@5633.27,2133.9 ; 5646.69,2104.54 cw(c5688.22,2104.54) 5658.85,2133.9 ccw(c5688.22,2104.54) 5646.69,2104.54 ; 5677.45,1922.55 ccw(c5750,1995.1) 5750,1892.5 cw(c5750,1995.1) 5677.45,1922.55 ; 5703.05,1896.95 ccw(c5750,1943.89) 5750,1877.5 cw(c5750,1943.89) 5703.05,1896.95 ; 5728.66,1871.34 ccw(c5750,1892.68) 5750,1862.5 cw(c5750,1892.68) 5728.66,1871.34
NetR10_2: R10.2 R11.1 U1.10 | length 878.9
  Bottom Layer w15: R10.2@5820,2056.69 5820,2039.3 5838.15,2021.15 ; U1.10@5850,1850 5850,1894.07 5892.61,1936.67 5892.61,1966.69 5874.45,1984.84 5874.45,2015.55 5868.85,2021.15 ; 5838.15,2021.15 cw(c5850.28,2033.28) 5837.46,2044.67 ccw(c5850.28,2033.28) 5838.15,2021.15 ; 5838.15,2021.15 cw(c5838.15,1978.55) 5878.8,1991.29 ccw(c5838.15,1978.55) 5838.15,2021.15 ; 5838.15,2021.15 5868.85,2021.15 ; 5868.85,2021.15 cw(c5846.71,1999) 5877.99,1997.54 ccw(c5846.71,1999) 5868.85,2021.15 ; 5868.85,2021.15 ccw(c5886.69,2038.98) 5892.15,2014.35 cw(c5886.69,2038.98) 5868.85,2021.15 ; 5892.61,1966.5 cw(c5906.45,1966.5) 5901.95,1979.59 ccw(c5906.45,1966.5) 5892.61,1966.5 ; 5892.61,1966.5 ccw(c5872.22,1966.5) 5884.85,1982.49 cw(c5872.22,1966.5) 5892.61,1966.5 ; U1.10@5855,1887.5 cw(c5882.93,1887.5) 5863.18,1907.25 ccw(c5882.93,1887.5) U1.10@5855,1887.5 ; 5858.57,2021.15 cw(c5858.57,1984.95) 5893.11,1995.77 ccw(c5858.57,1984.95) 5858.57,2021.15 ; R11.1@5883.27,1983.9 cw(c5860.74,1961.37) 5892.61,1961.37 ccw(c5860.74,1961.37) R11.1@5883.27,1983.9 ; 5892.61,1944.67 cw(c5948.09,1944.67) 5908.85,1983.9 ccw(c5948.09,1944.67) 5892.61,1944.67
NetR12_1: R12.1 U1.13 U1.14 | length 382.1
  Bottom Layer w15: U1.13@6000,1850 U1.14@6050,1850 6050,1896.69 6120,1966.69 ; U1.14@6055,1887.5 cw(c6089.26,1887.5) 6065.04,1911.73 ; R12.1@6120,2006.69 6120,1966.69 ; 6120,1966.69 cw(c6155.17,1966.69) 6131.95,1993.11 ccw(c6155.17,1966.69) 6120,1966.69 ; 6120,1966.69 ccw(c6084.83,1966.69) 6108.05,1993.11 cw(c6084.83,1966.69) 6120,1966.69
NetR13_1: R13.1 U2.1 U2.2 | length 298.1
  Bottom Layer w15: U2.2@5990,2780 U2.1@6040,2780 6040,2693.31 R13.1@6030,2683.31 ; U2.1@6035.67,2740 cw(c6024.54,2733.58) U2.1@6036.95,2730.25 ; R13.1@6021.15,2696.1 ccw(c5975.63,2741.62) 6040,2741.62 cw(c5975.63,2741.62) R13.1@6021.15,2696.1 ; 6040,2712.34 ccw(c6062.97,2712.34) 6046.73,2696.1 cw(c6062.97,2712.34) 6040,2712.34
NetR15_1: R15.1 U2.8 U2.9 | length 361.7
  Bottom Layer w15: R15.1@5663.31,3040 5730,3040 U2.8@5740,3030 U2.9@5790,3030 ; 5718.16,3037.03 ccw(c5730.91,3059.11) U2.8@5738.51,3034.77 ; 5706.98,3040 cw(c5706.98,3083.67) 5676.1,3052.79 ccw(c5706.98,3083.67) 5706.98,3040 ; 5706.98,3040 ccw(c5706.98,2996.33) 5676.1,3027.21 cw(c5706.98,2996.33) 5706.98,3040 ; 5703.79,3040 cw(c5703.79,2993.79) 5736.46,3026.46 ccw(c5703.79,2993.79) 5703.79,3040
NetR1003_2: R1003.2 U1004.17 | length 316.7
  Bottom Layer w15: U1004.17@4867.17,1280 R1003.2@5046.69,1280 ; 5003.02,1280 cw(c5003.02,1236.33) 5033.9,1267.21 ccw(c5003.02,1236.33) 5003.02,1280 ; 5003.02,1280 ccw(c5003.02,1323.67) 5033.9,1292.79 cw(c5003.02,1323.67) 5003.02,1280
NetR1005_1: R1005.1 U1005.8 | length 228.5
  Bottom Layer w20: R1005.1@3885,1385 3885,1345 ; U1005.8@3940,1290 3885,1345 ; 3885,1345 cw(c3918.91,1345) 3895.68,1369.71 ccw(c3918.91,1345) 3885,1345 ; 3885,1345 ccw(c3851.09,1345) 3874.32,1369.71 cw(c3851.09,1345) 3885,1345
OUTCURRENT: C15.2 R15.2 U1002.28 | length 1609
  Bottom Layer w15: U1002.28@4690,3140 4910,2920 5250,2920 5373.31,3043.31 C15.2@5490,3043.31 5573.39,3043.31 R15.2@5576.69,3040 ; 4727.6,3102.4 cw(c4765.21,3140) 4712.03,3140 ccw(c4765.21,3140) 4727.6,3102.4 ; 4727.6,3102.4 ccw(c4690,3064.79) 4690,3117.97 cw(c4690,3064.79) 4727.6,3102.4 ; 5442.39,3043.31 cw(c5442.39,2999.63) 5473.27,3030.52 ccw(c5442.39,2999.63) 5442.39,3043.31 ; 5442.39,3043.31 ccw(c5442.39,3086.98) 5473.27,3056.1 cw(c5442.39,3086.98) 5442.39,3043.31 ; 5537.61,3043.31 cw(c5537.61,3086.98) 5506.73,3056.1 ccw(c5537.61,3086.98) 5537.61,3043.31 ; 5537.61,3043.31 ccw(c5537.61,2999.63) 5506.73,3030.52 cw(c5537.61,2999.63) 5537.61,3043.31 ; 5531.5,3043.31 ccw(c5531.5,3089.13) 5563.9,3056.73 cw(c5531.5,3089.13) 5531.5,3043.31 ; 5534.54,3043.31 cw(c5534.54,3001.78) 5563.9,3031.15 ccw(c5534.54,3001.78) 5534.54,3043.31
RXCAN: U1004.2 U1005.4 | length 669.8
  Bottom Layer w15: U1005.4@4180,1145 4565,1145 4610,1190 4610,1240 4570,1280 U1004.2@4512.83,1280 ; U1005.4@4230.83,1143.73 ccw(c4237.03,1150.67) 4241.68,1142.61 ; U1005.4@4231.04,1136.46 cw(c4251.64,1115.86) 4251.64,1145 ccw(c4251.64,1115.86) U1005.4@4231.04,1136.46
TXCAN: U1004.1 U1005.1 | length 417.2
  Bottom Layer w15: U1005.1@4180,1295 4345,1295 4410,1230 U1004.1@4512.83,1230 ; U1005.1@4230.83,1293.73 ccw(c4237.03,1300.67) 4241.68,1292.61 ; U1005.1@4231.04,1286.46 cw(c4251.64,1265.86) 4251.64,1295 ccw(c4251.64,1265.86) U1005.1@4231.04,1286.46
USART_RTS: C1012.2 P1001.1 | length 564.7
  Bottom Layer w15: P1001.1@3940,3350 4050,3350 4140,3260 C1012.2@4246.69,3260 ; P1001.1@3955.58,3334.42 cw(c3993.18,3296.82) 3993.18,3350 cw(c3993.18,3403.18) P1001.1@3955.58,3365.58 ; 4203.02,3260 cw(c4203.02,3216.33) 4233.9,3247.21 ccw(c4203.02,3216.33) 4203.02,3260 ; 4203.02,3260 ccw(c4203.02,3303.67) 4233.9,3272.79 cw(c4203.02,3303.67) 4203.02,3260
USART_RX: P6.2 P1001.4 U1002.2 | length 789.4
  Bottom Layer w20: P1001.4@3940,3050 4160,3050 4170,3040 ; P1001.4@3953.81,3036.19 cw(c3987.14,3002.86) 3987.14,3050 cw(c3987.14,3097.14) P1001.4@3953.81,3063.81 ; P6.2@4224.14,3025.86 cw(c4258.28,2991.72) 4258.28,3040 cw(c4258.28,3088.28) P6.2@4224.14,3054.14 ; U1002.2@4376.19,3026.19 ccw(c4342.86,2992.86) 4342.86,3040 ccw(c4342.86,3087.14) U1002.2@4376.19,3053.81 ; U1002.2@4390,3040 4170,3040 ; 4170,3040 cw(c4170,3010) 4194,3028 ccw(c4170,3010) 4170,3040 ; 4170,3040 ccw(c4170,3070) 4194,3052 cw(c4170,3070) 4170,3040
USART_TX: P6.3 P1001.5 U1002.3 | length 789.4
  Bottom Layer w20: P1001.5@3940,2950 4160,2950 4170,2940 ; P1001.5@3953.81,2936.19 cw(c3987.14,2902.86) 3987.14,2950 cw(c3987.14,2997.14) P1001.5@3953.81,2963.81 ; P6.3@4224.14,2925.86 cw(c4258.28,2891.72) 4258.28,2940 cw(c4258.28,2988.28) P6.3@4224.14,2954.14 ; U1002.3@4376.19,2926.19 ccw(c4342.86,2892.86) 4342.86,2940 ccw(c4342.86,2987.14) U1002.3@4376.19,2953.81 ; U1002.3@4390,2940 4170,2940 ; 4170,2940 cw(c4170,2910) 4194,2928 ccw(c4170,2910) 4170,2940 ; 4170,2940 ccw(c4170,2970) 4194,2952 cw(c4170,2970) 4170,2940
XTAL1: C1010.2 U1002.9 Y1001.1 | length 917.5
  Bottom Layer w15: C1010.2@4040,2340 Y1001.1@4188.94,2340 ; 4108.97,2340 ccw(c4108.97,2422.09) Y1001.1@4167.02,2364.04 ; 4114.1,2340 cw(c4114.1,2265.17) Y1001.1@4167.02,2318.08 ; 4145.19,2340 ccw(c4145.19,2385.88) Y1001.1@4177.63,2353.44 ; Y1001.1@4190,2341.06 U1002.9@4388.94,2341.06 ; Y1001.1@4202.37,2328.69 cw(c4232.25,2298.81) 4232.25,2341.06 cw(c4232.25,2383.31) Y1001.1@4202.37,2353.44 ; Y1001.1@4212.98,2318.08 cw(c4268.46,2262.6) 4268.46,2341.06 cw(c4268.46,2419.52) Y1001.1@4212.98,2364.04 ; 4334.25,2341.06 cw(c4334.25,2284.25) U1002.9@4374.42,2324.42 ; 4339.39,2341.06 ccw(c4339.39,2390.61) U1002.9@4374.42,2355.58 ; 4083.67,2340 cw(c4083.67,2383.67) 4052.79,2352.79 ccw(c4083.67,2383.67) 4083.67,2340 ; 4083.67,2340 ccw(c4083.67,2296.33) 4052.79,2327.21 cw(c4083.67,2296.33) 4083.67,2340
XTAL2: C1011.2 U1002.10 Y1001.2 | length 964.8
  Bottom Layer w15: C1011.2@4046.06,2148.94 Y1001.2@4190,2148.94 ; Y1001.2@4167.02,2125.96 ccw(c4111.54,2070.48) 4111.54,2148.94 ccw(c4111.54,2227.4) Y1001.2@4167.02,2171.92 ; Y1001.2@4177.63,2136.56 ccw(c4147.75,2106.69) 4147.75,2148.94 ccw(c4147.75,2191.19) Y1001.2@4177.63,2161.31 ; Y1001.2@4190,2160 4270,2240 U1002.10@4390,2240 ; Y1001.2@4190,2181.44 ccw(c4190,2233.19) 4226.6,2196.6 ; Y1001.2@4207.5,2148.94 cw(c4276.46,2148.94) 4227.7,2197.7 ; Y1001.2@4222.5,2148.94 cw(c4327.67,2148.94) 4253.3,2223.3 ; U1002.10@4374.42,2224.42 ccw(c4336.82,2186.82) 4336.82,2240 ccw(c4336.82,2293.18) U1002.10@4374.42,2255.58 ; C1011.2@4052.79,2138.27 cw(c4078.54,2112.52) 4078.54,2148.94 ccw(c4078.54,2112.52) C1011.2@4052.79,2138.27 ; C1011.2@4052.79,2163.85 ccw(c4088.81,2199.87) 4088.81,2148.94 cw(c4088.81,2199.87) C1011.2@4052.79,2163.85
pads on no net: J1001.6 J1002.6 P6.1 P1001.3 U2.7 U2.14 U1002.5 U1002.6 U1002.11 U1002.13 U1002.15 U1002.21 U1004.3 U1004.4 U1004.5 U1004.6 U1004.10 U1004.11 U1005.5

## Polygon pours and split planes (outlines as drawn)
CAN_GND on Bottom Layer "JOJ" (solid, remove dead copper, pour order 5): 1900,4500 7500,4500 7500,630 7520,610 7500,610 1920,610 1910,600

## Keep-outs
Top Overlay:
  the board outline again, w10

## Silkscreen, mask and mechanical layers (free items; w line width, h text height)
Top Overlay:
  text "GND" at 4790,3780 h60 r90
  text "Vcc" at 5190,3780 h60 r90
  text "Motor_RPM" at 5010,3770 h60 r90
  text "GND" at 5390,3770 h60 r90
  text "Vcc" at 5790,3770 h60 r90
  text "Out_Current" at 5590,3760 h60 r90
  text "GND" at 5970,3760 h60 r90
  text "In_Current" at 6220,3760 h60 r90
  text "Vcc" at 6370,3760 h60 r90
  text "+" at 6400,3000 h60
  text "-" at 6450,2800 h60 r90
  text "Motor Volt" at 7000,2700 h60 r90
  text "GND" at 6300,2600 h60
  text "Btt Temp" at 6000,2400 h60
  text "+5V" at 6300,2200 h60
  text "GND" at 6300,1970 h60
  text "Motor Temp" at 5900,1820 h60
  text "CAN<3" at 2290,1660 h150.48 r90
  text "+5V" at 6300,1620 h60
  text "+" at 6450,1410 h60 r90
  text "-" at 6450,1210 h60 r90
  text "Btt Volt" at 7000,1130 h60 r90

## Dimensions
2200,4200 to 7200,4200 on Top Overlay
2200,4200 to 2200,900 on Top Overlay
7500,600 to 7500,4500 on Top Overlay
1900,600 to 7500,600 on Top Overlay

## Text inside footprints (layer, text, board x,y; h text height)
C1002: Top Overlay "+" at 3590,3587.8 h59.06 r270; Top Overlay "-" at 3590,3447.8 h59.06 r270
C1003: Top Overlay "+" at 3461.1,3190 h59.06; Top Overlay "-" at 3601.1,3190 h59.06